# EAGLE board LedLamp - Rev A1 (EAGLE 7.6.0)
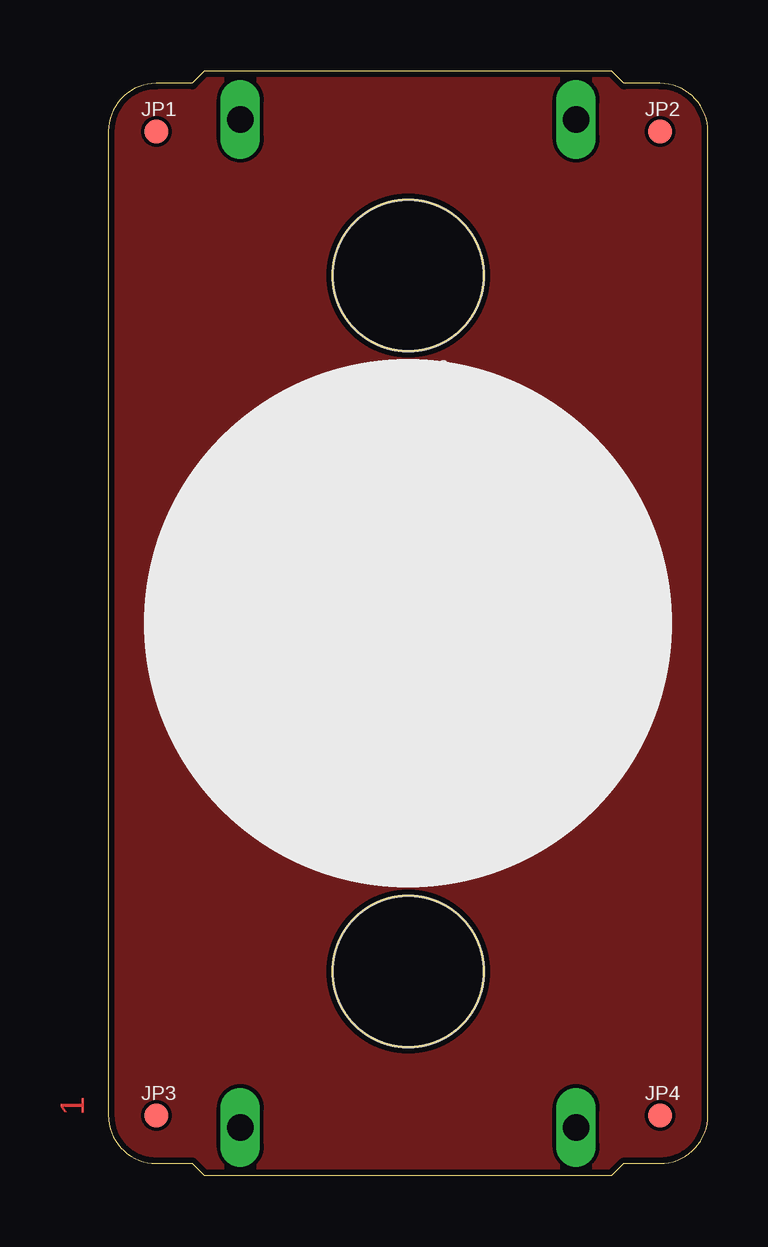
[diagram p0: board, top side]
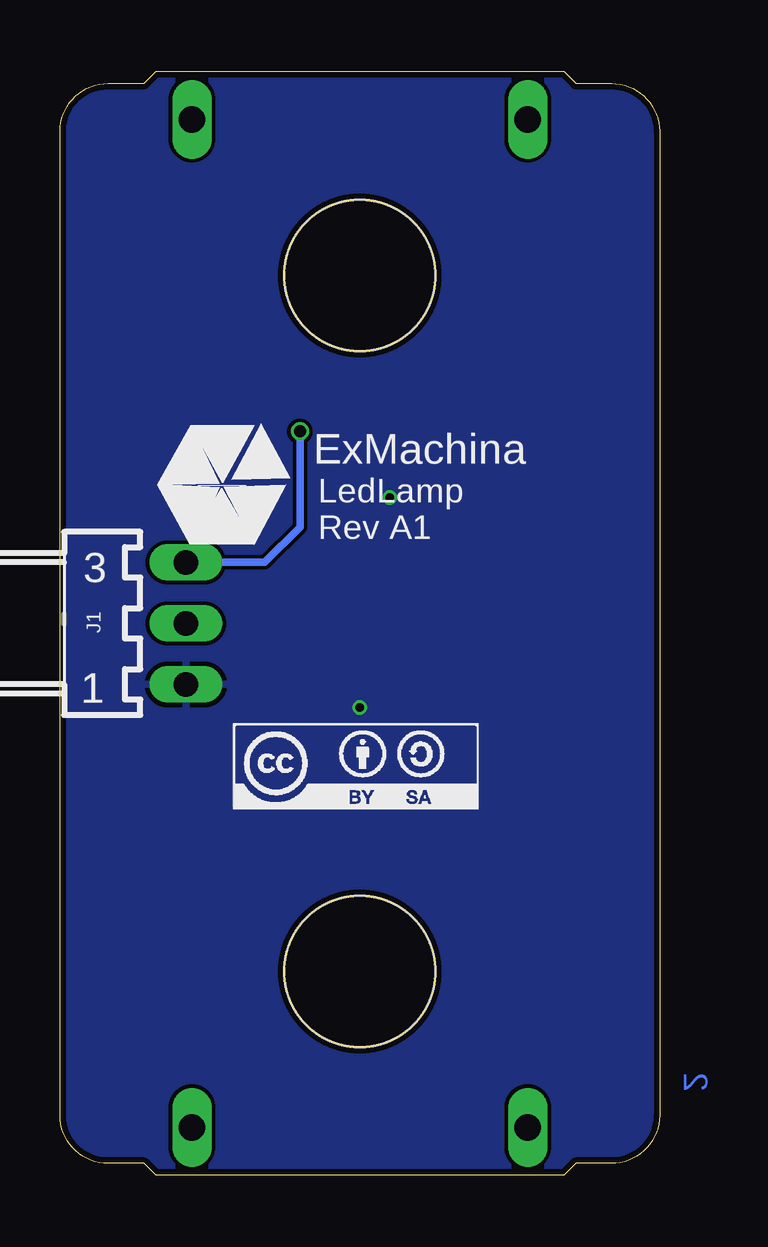
[diagram p1: board, bottom side, seen from below]

Size 25 x 46 mm. Coordinates in mm from the lower left corner, seen from the top.
Outline: 0,43.5 0,2.5 arc90 2,0.5 3.5,0.5 4,0 21,0 21.5,0.5 23,0.5 arc90 25,2.5 25,43.5 arc90 23,45.5 21.5,45.5 21,46 4,46 3.5,45.5 2,45.5 arc90 0,43.5
Copper layers (1*16): Top 0.018mm / dielectric 1.55mm / Bottom 0.018mm
Design rules "eC_2Layer_PClass6_BaseCopperO18_eCDefault": minimum track width 0.15mm, minimum drill 0.35mm, track to track 0.15mm, track to pad 0.15mm, pad to pad 0.15mm, via to via 0.15mm, smd to smd 0mil, copper to edge 0.25mm, drill to drill 0.35mm, minimum pad ring 0.175mm, minimum via ring 0.125mm, stop-mask expansion 0mil, vias tented up to drill 0.45mm, thermal gap 0.2mm
Holes 6.3 mm at 12.5,37.5 12.5,8.5

## Footprints (pad centres in the part's own frame; a part is rotated, then mirrored left to right if it is on the bottom)
C0603 = smd 1.1 x 1: 1 -0.85,0; 2 0.85,0
7395-03 = drill 1.016 long: 1 2.54,0; 2 0,0; 3 -2.54,0
FIDUCIAL-1X2 = smd 1 x 1: 1 0,0
CHIP-LED0603 = smd 0.8 x 0.8: A 0,-0.75; C 0,0.75
R0603 = smd 1 x 1.1: 1 -0.85,0; 2 0.85,0
SOT95P240X112-3N = smd 1.321 x 0.559: 1 -1.092,0.94; 2 -1.092,-0.94; 3 1.092,0
IMO-FIXHOLES = drill 1.1 long: P$1 -7,21; P$2 7,21; P$3 7,-21; P$4 -7,-21

## Placement (x,y rotation side)
C1  0.1uF  [C0603]  12.5,17.5 270 top
J1  22-05-7038-03  [7395-03]  19.75,23 270 bottom
JP1  FIDUCIAL1X2  [FIDUCIAL-1X2]  2,43.5 0 top
JP2  FIDUCIAL1X2  [FIDUCIAL-1X2]  23,43.5 0 top
JP3  FIDUCIAL1X2  [FIDUCIAL-1X2]  2,2.5 0 top
JP4  FIDUCIAL1X2  [FIDUCIAL-1X2]  23,2.5 0 top
LED1  white  [CHIP-LED0603]  10,25.5 225 top
LED2  white  [CHIP-LED0603]  15,25.5 135 top
LED3  white  [CHIP-LED0603]  15,20.5 45 top
LED4  white  [CHIP-LED0603]  10,20.5 315 top
LED5  white  [CHIP-LED0603]  12.5,23 90 top
R1  100  [R0603]  8,27.5 315 top
R2  100  [R0603]  17,27.5 225 top
R3  100  [R0603]  17,18.5 135 top
R4  100  [R0603]  8,18.5 45 top
R5  100  [R0603]  15.5,23 180 top
R6  100  [R0603]  14.25,32.25 180 top
U1  IRLML6344TRPBF  [SOT95P240X112-3N]  12.5,28.75 270 top
U$1  IMO-FIXHOLES  [IMO-FIXHOLES]  12.5,23 0 top
U$2  EXMACHINA-LOGO-NAME  [EXM-LOGO-BASELINE]  18.25,28.75 0 bottom
U$3  CC-BY-SA  [CC-BY-SA]  12.5,17.5 0 bottom

## Library data of the parts
C1 R1-R6 = rcl
J1 = con-molex; OC_FARNELL: 9731610; OC_NEWARK: unknown
JP1-JP4 = SparkFun
LED1-LED5 = led
U1 = International_Rectifier_By_element14_Batch_1; MPN: IRLML6344TRPBF; OC_FARNELL: 1857299; OC_NEWARK: 25T5501; PACKAGE: SOT-23-3; SUPPLIER: INTERNATIONAL RECTIFIER
U$1 = imo
U$2 = exmachina
U$3 = cc-by-sa

## Nets
+5V: C1.2 J1.2 R1.1 R2.1 R3.1 R4.1 R5.1
GND: C1.1 J1.1 U1.2
LED_CMD: J1.3 R6.1
LED_GND: LED1.C LED2.C LED3.C LED4.C LED5.C U1.3
N$1: LED1.A R1.2
N$2: LED2.A R2.2
N$3: LED3.A R3.2
N$4: LED4.A R4.2
N$5: LED5.A R5.2
N$6: R6.2 U1.1

## Tracks (layer width: path | path; a pad name or v marks a point on that pad's centre or on a via)
+5V
  pour Top (rank 6): -1,-0.5 26,-0.5 26,46.5 -1,46.5
GND  (via drill 0.35)
  Top 0.305: C1.1 v12.5,19.5 | U1.2 11.56,28.56 v11.25,28.25
  pour Bottom (rank 6): -1,-0.5 26,-0.5 26,46.5 -1,46.5
LED_CMD  (via drill 0.5)
  Top 0.305: v15,31 15,32.15 R6.1
  Bottom 0.305: J1.3 16.46,25.54 15,27 v15,31
LED_GND
  Top 0.406: U1.3 12.5,24.75
  pour Top: 10,24 10,21 15,21 15,25 10,25
N$1
  Top 0.305: R1.2 LED1.A
N$2
  Top 0.305: LED2.A R2.2
N$3
  Top 0.305: R3.2 LED3.A
N$4
  Top 0.305: R4.2 LED4.A
N$5
  Top 0.305: R5.2 LED5.A
N$6
  Top 0.305: U1.1 13.44,32.21 R6.2

## Text on the board
Top: 1
Bottom: 2
bPlace: LedLamp / Rev A1